# Altium PCB File_Mach_In.PcbDoc
Units mil, origin at the board's own origin, x right, y up, seen from the top; angles counter-clockwise.
Board outline 4260 x 4090 mil, 2 copper layers (Top Layer, Bottom Layer); 41 components, 27 nets, 131 pads, 20 vias.
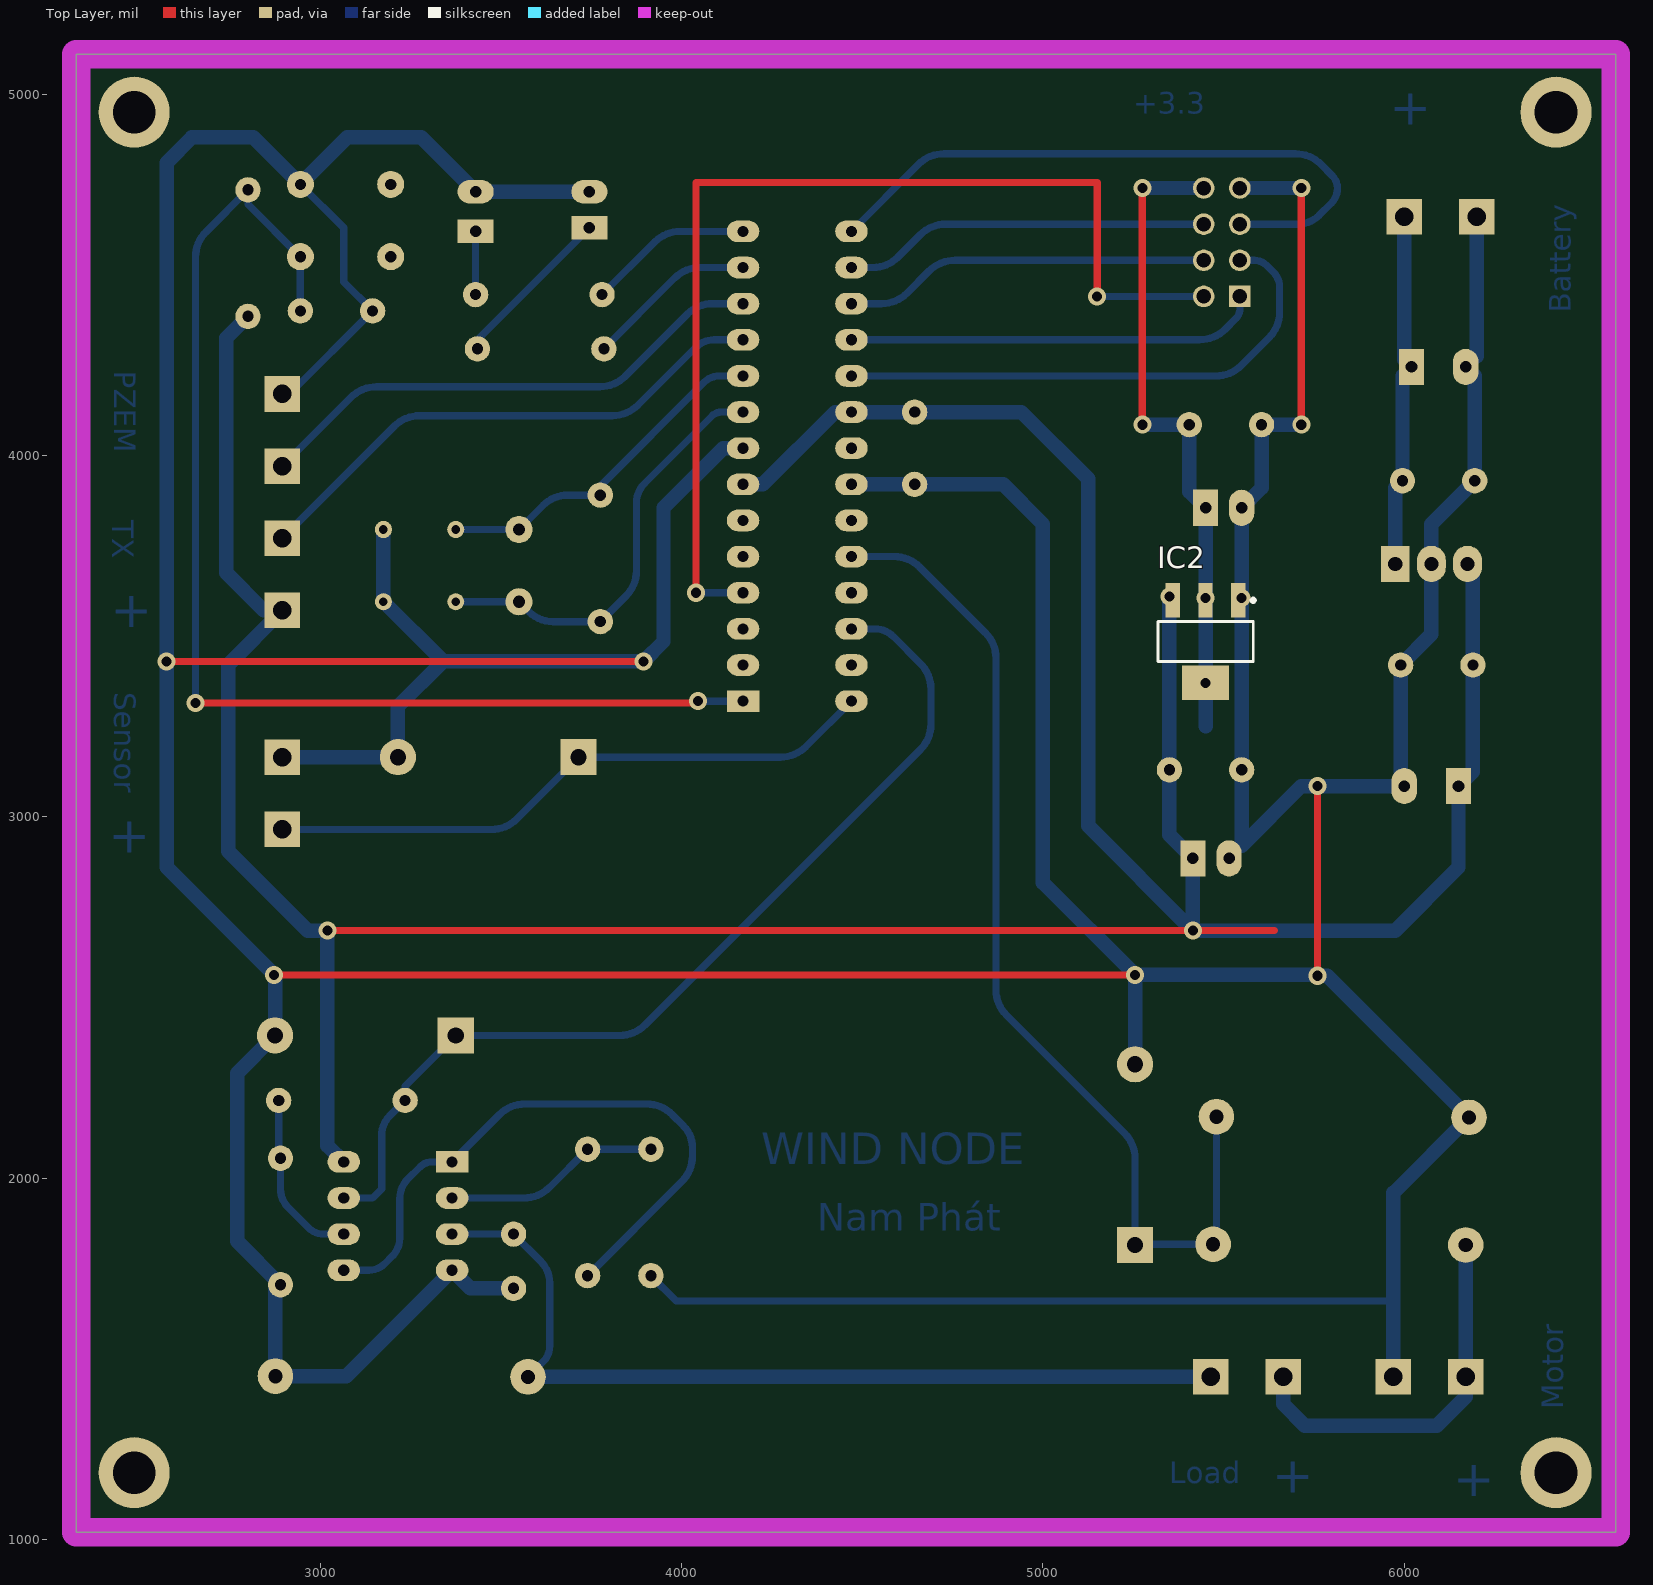
[diagram p0: Top Layer view]
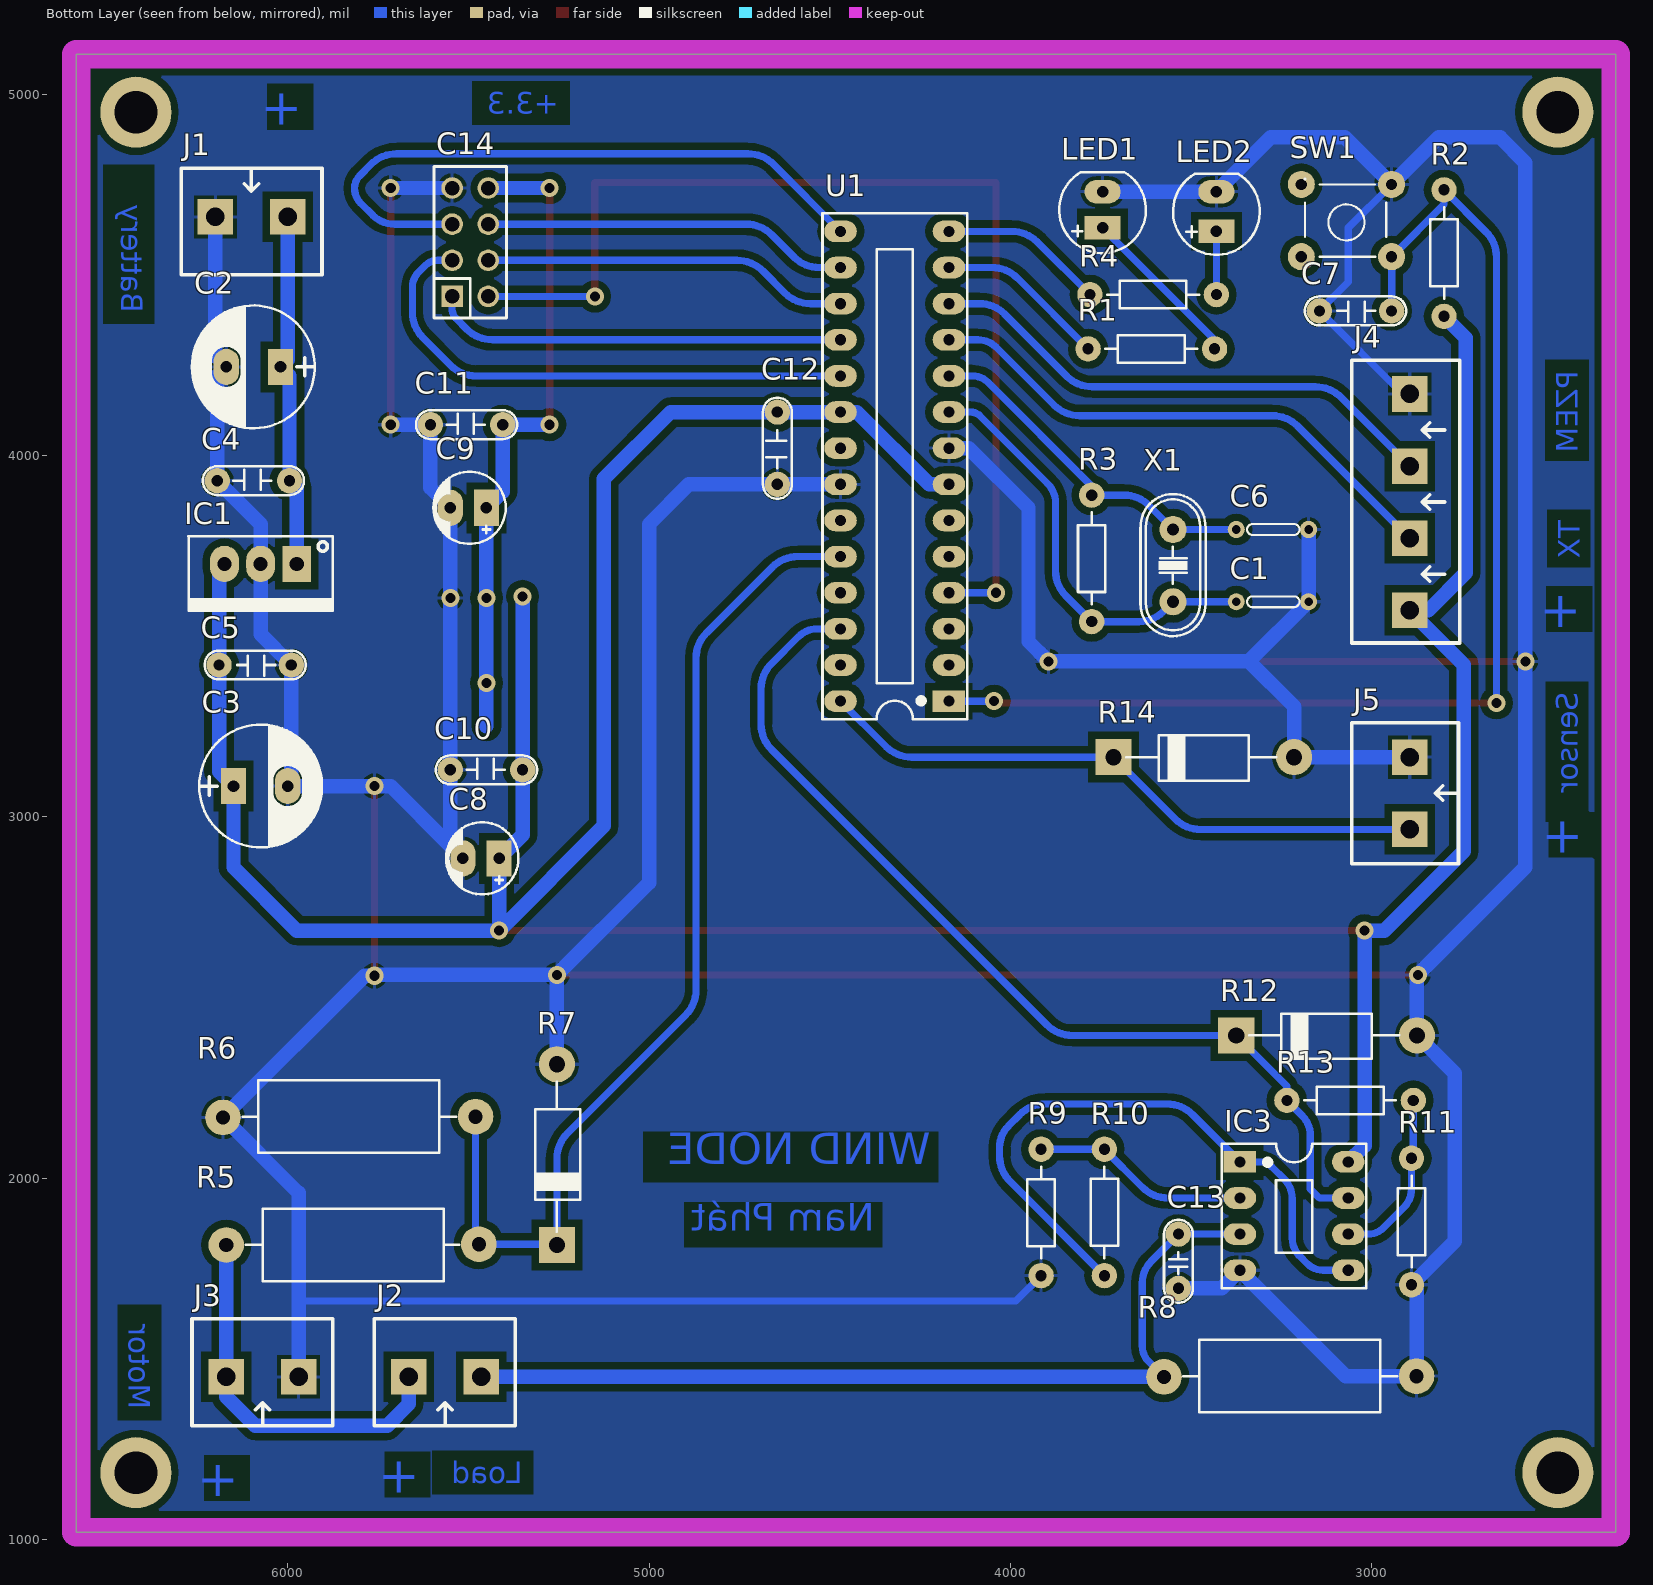
[diagram p1: Bottom Layer view, seen from below]
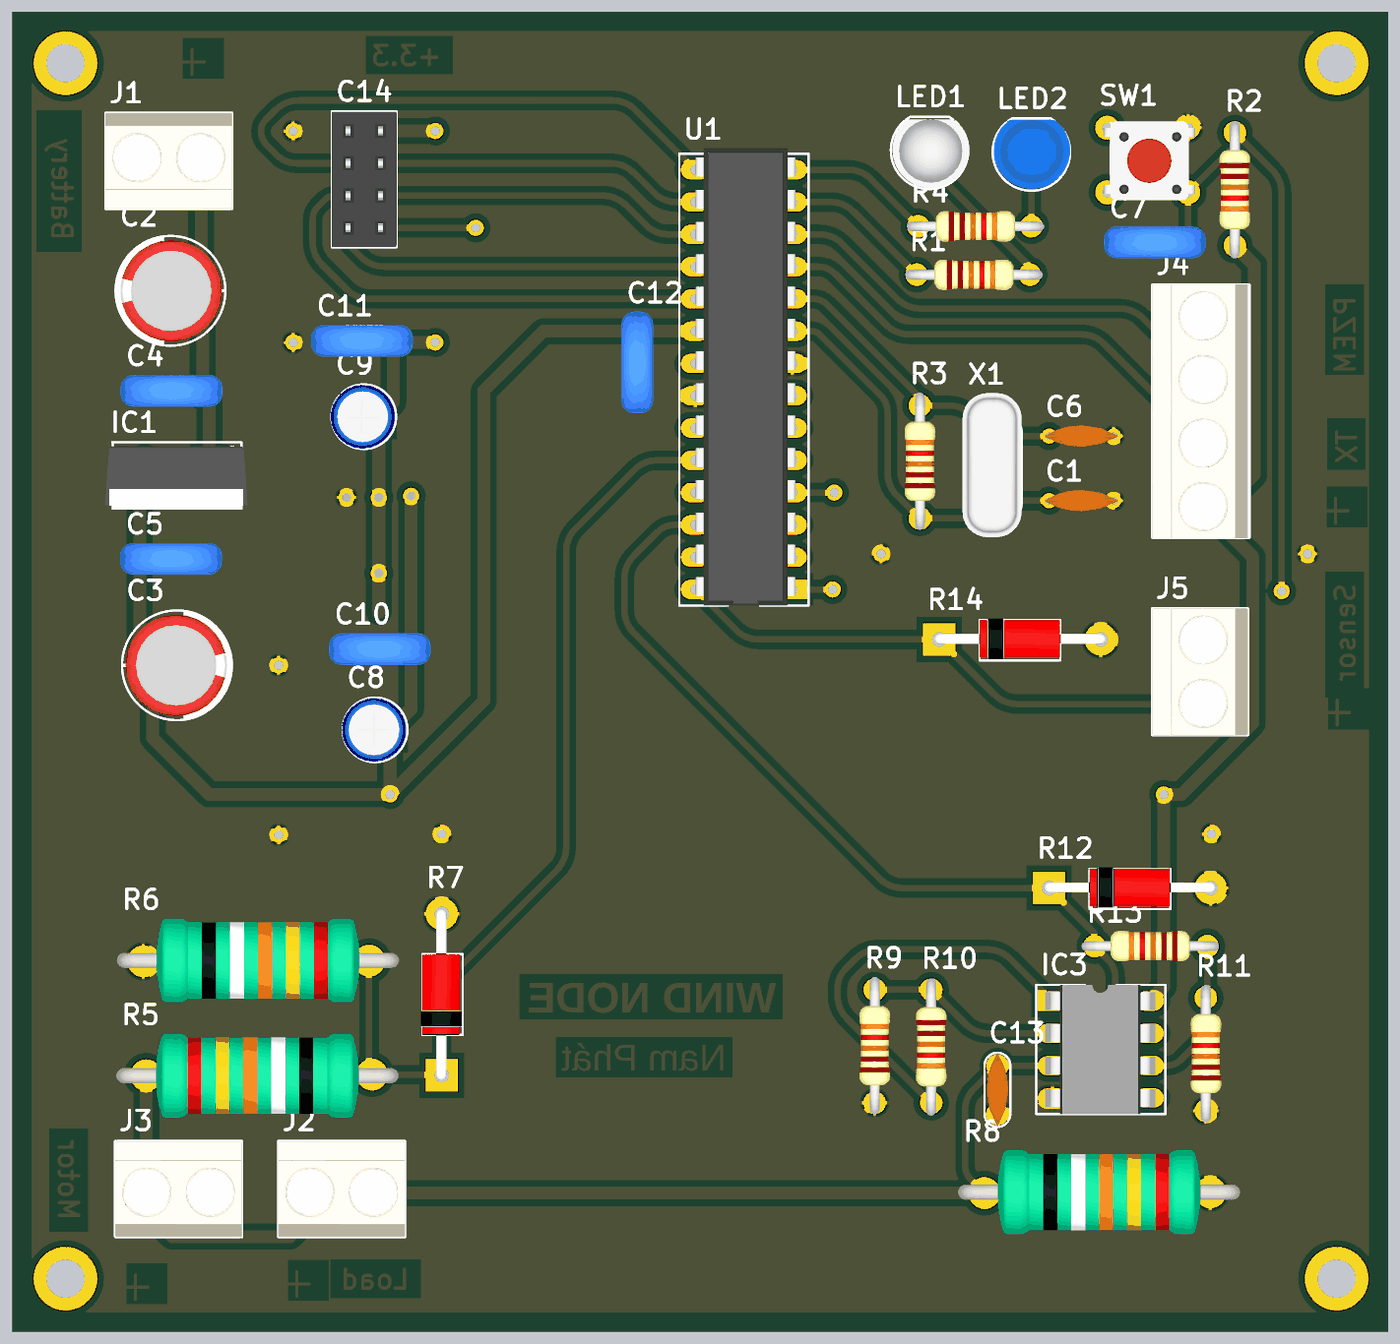
[diagram p2: 3D render of the assembled board from below, using the file's embedded part models]

## Layer stack, top to bottom
Top Solder: solder mask 0.4, Solder Resist, Dk 3.5
Top Layer: signal copper 1.4
Dielectric 1: dielectric 12.6, FR-4, Dk 4.8
Bottom Layer: signal copper 1.4
Bottom Solder: solder mask 0.4, Solder Resist, Dk 3.5

## Board outline
2325,1020 2325,5110 6585,5110 6585,1020

## Design rules (kind name [scope] priority, off if disabled: settings)
Clearance [All] p1: gap=20 ignorepadtopadclearanceinfootprint=FALSE
PolygonConnect [All] p1: connectstyle=Relief reliefconductorwidth=10 reliefentries=4 polygonreliefangle="90 Angle" airgapwidth=10
RoutingVias [All] p1: holewidth=30 width=70 viastyle="Through Hole" minholewidth=30 minwidth=70 maxholewidth=30 maxwidth=70
SolderMaskExpansion [All] p1: expansion=4
Width [All] p1: maxlimit=40 minlimit=20 preferedwidth=20
30 further rules are at their usual default settings.

## Components (designator, comment, footprint, x,y, rotation, side; value= is the part's Value field where it differs from the comment)
C1 "Capacitor Ceramic" Tu-ceramic 3175,3595 r0 bottom value=22p
C2 "220uF/16V" CP1.5/3.4 6020,4245 r0 bottom value=1000uF/16V
C3 "220uF/16V" CP1.5/3.4 6150,3085 r180 bottom value=1000uF/16V
C4 "104" CN2 6195,3930 r180 bottom value=0.1uF
C5 "104" CN2 5990,3420 r0 bottom value=0.1uF
C6 "Capacitor Ceramic" Tu-ceramic 3175,3795 r0 bottom value=22p
C7 "104" CN2 2945,4400 r0 bottom value=0.1uF
C8 "10uF" CP1/2 5415,2885 r0 bottom value=10uF/50V
C9 "10uF" CP1/2 5450,3855 r0 bottom value=10uF/50V
C10 "104" CN2 5550,3130 r180 bottom value=0.1uF
C11 "104" CN2 5605,4085 r180 bottom value=0.1uF
C12 "104" CN2 4645,3920 r90 bottom value=0.1uF
C13 "103" CN1.5 3535,1695 r90 bottom value=0.01uF
C14 "JP4x2" JP4-C2T 5495,4590 r90 bottom
IC1 "LM7805" QTO-220 5975,3700 r0 bottom
IC2 "LM1117" SOT223-4N 5450,3485 r270 top value=LM317
IC3 "LM358" DIP8/W0.3 3365,2045 r270 bottom
J1 "KF2" KF2-5.08 6100,4660 r180 bottom
J2 "KF2" KF2-5.08 5565,1450 r0 bottom
J3 "KF2" KF2-5.08 6070,1450 r0 bottom
J4 "KF4" KF4-5.08 2895,3571 r90 bottom
J5 "KF2" KF2-5.08 2895,3065 r270 bottom
LED1 "LED" LED-5-Yellow 3745,4630 r90 bottom value="LED 3 ly Single Colour"
LED2 "LED" LED-5-BLUE 3430,4675 r90 bottom value="LED 3 ly Single Colour"
R1 "330" R1/4W 3435,4295 r0 bottom value="R1/4W - 1K"
R2 "10k" R1/4W 2800,4385 r90 bottom value="R1/4W - 1K"
R3 "1M" R1/4W 3775,3890 r270 bottom value="R1/4W - 1K"
R4 "330" R1/4W 3430,4445 r0 bottom value="R1/4W - 1K"
R5 "10K/2W" R2W 6170,1815 r180 bottom value="R2W - 47"
R6 "2K/2W" R2W 5480,2170 r0 bottom value="R2W - 47"
R7 "DIODE Zener" "DIO-2A - LONG" 5255,1790 r90 bottom
R8 "0.1/2W" R2W 2876,1452 r0 bottom value="R2W - 47"
R9 "1k" R1/4W 3915,2080 r270 bottom value="R1/4W - 1K"
R10 "10k" R1/4W 3740,1730 r90 bottom value="R1/4W - 1K"
R11 "1k" R1/4W 2890,2055 r270 bottom value="R1/4W - 1K"
R12 "DIODE Zener" "DIO-2A - LONG" 3400,2395 r180 bottom
R13 "10k" R1/4W 3235,2215 r180 bottom value="R1/4W - 1K"
R14 "DIODE Zener" "DIO-2A - LONG" 3740,3165 r180 bottom
SW1 "SW" SW4 2945,4550 r0 bottom value="Button chip 4 pin"
U1 "ATmega328-PU" DIP28 4170,3320 r90 bottom
X1 "16Mhz" XT2 3550,3695 r270 bottom value=4Mhz

## Footprints (in the part's own frame and the unit in brackets; to place one, negate y for a bottom-side part, rotate by r counter-clockwise, add the part's x,y. Pads: shape width x height; smd on the part's side, far side on the other; paste and mask are expansions set on the pad)
CN1.5 [mil]
  round 70 hole 31: 1(0,0) 2(150,0)
  silkscreen extent -40,-40 190,40, body extent -40,-33 190,33, height 235
CN2 [mil]
  round 70 hole 31: 1(0,0) 2(200,0)
  silkscreen extent -40,-40 240,40, body extent -54,-44 260,55, height 407
CP1.5/3.4 [mil] "Tu hoa 220->470uF,16V, 470uF/16V,25V"
  rect 70x100 hole 32: 1(0,0)
  oval 70x100 hole 32: 2(150,0)
  silkscreen extent -95,-170 245,170, body extent -85,-157 230,157, height 446
CP1/2 [mil] "Tu hoa < 22uF/16>50V"
  rect 70x100 hole 32: 1(0,0)
  oval 70x100 hole 32: 2(100,0)
  silkscreen extent -53,-100 147,100, body extent -49,-99 149,99, height 287
"DIO-2A - LONG" [mil] "Diode 2A, W 150mil, L 450mil"
  round 100 hole 45: 1(525,0)
  rect 100x100 hole 45: 2(25,0)
  silkscreen extent 61,-65 476,60, body extent 9,-61 541,65, height 113
DIP8/W0.3 [mil] "8 PIN, W 300mil, Pin to pin 100mil"
  rect 60x90 hole 31: 1(0,0)
  oval 60x90 hole 31: 2(100,0) 3(200,0) 4(300,0) 5(300,300) 6(200,300) 7(100,300) 8(0,300)
  silkscreen extent -50,-50 350,350, body extent -50,-40 350,336, height 201
DIP28 [mil] "DIP, 18-Leads, Row Spacing 7.62mm, Pitch 2.54mm, Body 22.8x7.3mm, Window"
  rect 60x90 hole 31: 1(0,0)
  oval 60x90 hole 31: 2(100,0) 3(200,0) 4(300,0) 5(400,0) 6(500,0) 7(600,0) 8(700,0) 9(800,0) 10(900,0) 11(1000,0) 12(1100,0) 13(1200,0) 14(1300,0) 15(1300,300) 16(1200,300) 17(1100,300) 18(1000,300) 19(900,300) 20(800,300) 21(700,300) 22(600,300) 23(500,300) 24(400,300) 25(300,300) 26(200,300) 27(100,300) 28(0,300)
  silkscreen extent -50,-50 1350,350, body extent -50,-10 1367,300, height 200
JP4-C2T [mm] "8 pins, dual row, straight, gold plating"
  rect 1.52x1.52 hole 1.02: 1(-3.81,1.27)
  round 1.52 hole 1.02: 2(-1.27,1.27) 3(1.27,1.27) 4(3.81,1.27) 5(3.81,-1.27) 6(1.27,-1.27) 7(-1.27,-1.27) 8(-3.81,-1.27)
  silkscreen extent -5.33,-2.54 5.33,2.54, body extent -5.33,-2.54 5.33,2.54, height 8.51
KF2-5.08 [mm]
  rect 2.5x2.5 hole 1.3: 1(-2.54,0) 2(2.54,0)
  silkscreen extent -4.95,-4.08 4.95,3.43, body extent -5,-4.07 5,3.43, height 10
KF4-5.08 [mm]
  rect 2.5x2.5 hole 1.3: 1(0,0) 2(5.08,0) 3(10.147,0) 4(15.215,0)
  silkscreen extent -2.29,-3.53 17.58,4.06, body extent -2.36,-3.43 17.64,4.07, height 10
LED-5-BLUE [mil] "LED 2 PIN, 5 ly , Only colour, pin to pin 110mil"
  rect 65x100 hole 32: 1(-55,0)
  oval 65x100 hole 32: 2(55,0)
  silkscreen extent -120,-120 104,120, body extent -113,-120 100,116, height 339
LED-5-Yellow [mil] "LED 2 PIN, 5 ly , Only colour,pin to pin 100mil"
  rect 65x100 hole 32: 1(0,0)
  oval 65x100 hole 32: 2(100,0)
  silkscreen extent -70,-120 154,120, body extent -67,-122 147,115, height 339
QTO-220 [mil] "TO-220 - 1-2-3"
  rect 80x100 hole 39: 1(0,0)
  oval 80x100 hole 39: 2(100,0) 3(200,0)
  silkscreen extent -100,-76 300,130, body extent -119,-64 322,121, height 755
R1/4W [mil] "R 1/4W, 2 Pin, 350mil"
  round 70 hole 31: 1(0,0) 2(350,0)
  silkscreen extent 48,-38 302,38, body extent -40,-47 386,47, height 111
R2W [mm] "R2W, 2 pin, 700mil"
  round 2.5 hole 1: 1(0,0) 2(17.755,0.051)
  silkscreen extent 1.37,-2.57 16.38,2.54, body extent -2.36,-3.33 19.84,3.27, height 8.3
SOT223-4N [mm] "SOT223, 4-Leads, Body 6.5x3.5mm, Pitch 2.3mm, Lead Span 7mm, IPC Medium Density"
  rect 2.4x1 smd: 1(-2.9,2.3) 2(-2.9,0) 3(-2.9,-2.3)
  rect 2.4x3.3 smd: 4(2.9,0)
  silkscreen extent -3.02,-3.35 1.4,3.48, body extent -3.39,-3.27 3.5,3.23, height 1.72
SW4 [mil] "SW button 4pin, 250 x250 mil"
  round 75 hole 31: 1(0,0) 2(250,-200) 3(250,0) 4(0,-200)
  silkscreen extent 15,-215 240,0, body extent -36,-220 276,24, height 276
Tu-ceramic [mm] "Tu gom mini"
  round 1.2 hole 0.6: 1(0,0) 2(5.08,0)
  silkscreen extent 0.64,-0.38 4.32,0.38, body extent -0.38,-0.85 5.46,0.85, height 6.12
XT2 [mil] "Footpin for Crystal 2 pin"
  round 75 hole 34: 1(-100,0) 2(100,0)
  silkscreen extent -198,-90 195,90, body extent -233,-93 213,90, height 138

## Part data
C1 C6: library part CapDecop, "Capacitor", LatestRevisionDate=17-Jul-2002, LatestRevisionNote="Re-released for DXP Platform.", PackageReference=RAD-0.3, Published=8-Jun-2000, Publisher="Altium Limited"
C2 C3: library part CP4, "Cap 1000uF/16V - 220uF/50V", Description 1="2200uF-3300uF/6,3V - 1000uF-2200uF/10V", Description 2="1000uF/16V - 470uF => 1000uF/25V - 100uF/100V", Description 3=330uF>470uF/35V_220uF>470uF/50V_10uF>22uF/250V, Description 4="220uF => 330uF/63V - 10uF =>33uF/160 - 200V", Description 5="4,7uF>10uF/250V_3,3uF>10uF/400V - 2,2uF>4,7uF/450V"
C4 C5 C7 C10 C11 C12: library part CN2, "Cap np 104 => 105pF"
C8 C9: library part CP1, "Cap P  0,1uF < 22uF , 16 - 50V", Description 1="10 => 220uF/6,3V/10V - 10uF => 100uF/16V", Description 2="0,1uF => 33uF/50V - 10uF => 22uF/63V", Description 3="0,47uF => 10uF/100V"
C13: library part CN1.5, "Cap np 682pF => 104pF"
C14: "WR-PHD 2.54 mm Dual Socket Header", Manufacturer="W¨¹rth Elektronik eiSos GmbH", partNo=61300821821, ComponentLink1 Description=Manufacturer, ComponentLink1URL=http://www.we-online.com, ComponentLink2 Description=Datasheet, ComponentLink2URL=http://katalog.we-online.de/em/datasheet/6130xx21821.pdf, Created by="Karrer Zheng", Created Date="29 March 2013", NoPins=08
IC1: library part LM78xx, "On ap +, from + 5 to + 24VDC", =LM7808
IC2: "Available in 1.8V, 2.5V, 2.85V, 3.3V, 5V, and  Adjustable Versions"
IC3: "Low-Power Dual Operational Amplifier"
J1 J2 J3 J5: Manufacturer="Würth Elektronik eiSos GmbH", partNo=691103110002, ComponentLink1 Description=Manufacturer, ComponentLink1URL=http://www.we-online.com, ComponentLink2 Description=Datasheet, ComponentLink2URL=http://katalog.we-online.de/em/datasheet/6911031100xx.pdf, Created by="Karrer Zheng", Created Date="29 October 2013", NoPins=2
J4: Manufacturer="W¨¹rth Elektronik eiSos GmbH", partNo=691133710004, ComponentLink1 Description=Manufacturer, ComponentLink1 URL=http://www.we-online.com, ComponentLink2 Description=Datasheet, ComponentLink2 URL=http://katalog.we-online.de/em/datasheet/6911337100xx.pdf, Created by="Baojun Chen", Created Date=4-Aug-15, NoPins=4
LED1 LED2: "LED Single colour Green and Red"
R1 R2 R3 R4 R9 R10 R11 R13: library part R1/4W, "Resistor 1/4W"
R5 R6 R8: library part R2W, "Resistor 2W"
R7 R12 R14: "Zenner"
SW1: library part SW4, "Switch button 4 pin"
U1: "8-bit AVR Microcontroller, 32KB Flash, 1KB EEPROM, 2KB SRAM, 28-pin PDIP, Industrial Grade (-40°C to 85°C)", Supplier Part Number 1=ATMEGA328-PU-ND, ComponentLink1Description="Manufacturer Link", ComponentLink1URL=http://www.atmel.com/products/avr/default.asp?, ComponentLink2Description="ATmega48A/48PA/88A/88PA/168A/168PA/328/328P Datasheet", ComponentLink2URL=http://www.atmel.com/dyn/resources/prod_documents/8271.pdf, ComponentLink3Description="ATmega48A/48PA/88A/88PA/168A/168PA/328/328P Summary", ComponentLink3URL=http://www.atmel.com/dyn/resources/prod_documents/8271S.pdf, ComponentLink4Description="Atmel.com Home", ComponentLink4URL=http://www.atmel.com, DatasheetVersion="revA, Jan-2010", PackageDescription="28-lead (0.300\"/7.62mm Wide) Plastic Dual Inline Package (PDIP)", PackageReference=28P3, PackageVersion="revB, Sep-2001", Published=1-Apr-2010, Publisher="Altium Limited", Supplier 1=Digi-Key, Supplier 2=Mouser, Supplier Part Number 2=556-ATMEGA328-PU
X1: library part XT2, "Crystal For all Crystal 2pin."

## Free pads (board coordinates)
  round 196.85 hole 118.11: 2(2485,1185) 2(2485,4950) 2(6420,1185) 2(6420,4950)

## Via types
v1: diameter 50, hole 28, Top Layer to Bottom Layer, 20 vias

## Nets (pads, with @x,y where several pads share a name; then routed paths per layer and width w, separated by ;. In a path a pad name is that pad's centre, name@x,y a point inside that pad or via, vN(x,y) a via of type N, cw(c..) or ccw(c..) an arc to the next point about the centre after c; other vN are vias at no path point)
+5: C3.1 C5.2 C8.1 C10.2 C12.2 IC1.3 IC2.3 IC3.8 J4.1 R2.1 U1.7 U1.20 | length 10412.6
  Top Layer w20: v1(3020,2685) v1(5415,2685) 5640,2685
  Bottom Layer w40: R2.1 2740,4325 2740,3675 2844,3571 J4.1 2745,3421 2745,2905 2965,2685 v1(3020,2685) 3020,2090 IC3.8 ; U1.7 4225,3920 4425,4120 U1.20 C12.2 4940,4120 5125,3935 5125,2975 v1(5415,2685) ; v1(5350,3610) C10.2 5350,2950 C8.1 v1(5415,2685) ; IC1.3 6190,3685 C5.2 6190,3125 C3.1 6150,2860 5975,2685 v1(5415,2685)
+12: C2.1 C4.2 IC1.1 J1.2 | length 986.9
  Bottom Layer w40: IC1.1 5975,3910 C4.2 5995,4220 C2.1 6000,4265 J1.2
DC_Cur: IC3.7 R12.2 R13.1 U1.26 | length 2712.4
  Bottom Layer w20: IC3.7 3145,1945 3170,1970 3170,2118.18 cw(c3246.82,2118.18) 3192.49,2172.49 R13.1 3235,2255 R12.2 3828.58,2395 ccw(c3828.58,2495) 3899.29,2424.29 4660.71,3185.71 ccw(c4590,3256.42) 4690,3256.42 4690,3353.58 ccw(c4590,3353.58) 4660.71,3424.29 4586.21,3498.79 ccw(c4535,3447.57) 4535,3520 U1.26
DC_Vol: R5.2 R6.1 R7.2 U1.24 | length 2880.2
  Bottom Layer w20: U1.24 4588.58,3720 cw(c4588.58,3620) 4659.29,3690.71 4840.71,3509.29 cw(c4770,3438.58) 4870,3438.58 4870,2521.42 ccw(c4970,2521.42) 4899.29,2450.71 5225.71,2124.29 cw(c5155,2053.58) 5255,2053.58 R7.2 5257,1817 R5.2 5480,1826 R6.1
GND: C1.1 C2.2 C3.2 C4.1 C5.1 C6.1 C7.2 C8.2 C9.2 C10.1 C11.1 C12.1 C13.1 C14.4 IC1.2 IC2.1 IC3.4 J1.1 J3.1 J4.4 J5.1 LED1.2 LED2.2 R6.2 R7.1 R8.1 R9.2 R11.2 R12.1 R14.1 SW1.4 U1.8 U1.22 | length 23647.6
  Top Layer w20: v1(2575,3430) v1(3895,3430) ; v1(2872.5,2562.5) v1(5255,2562.5) ; v1(5715,4085) v1(5715,4740) ; v1(5760,2560) v1(5760,3085)
  Bottom Layer w20: J4.4 2915,4170 C7.2 3065,4480 3065,4630 SW1.4 ; R9.2 3985,1660 5970,1660 ; C8.2 5550,2920
  Bottom Layer w40: J5.1 R14.1 3215,3305 3340,3430 ; C6.1 C1.1 3340,3430 ; C13.1 3415,1695 IC3.4 3072,1452 R8.1 2876,1691 R11.2 2770,1825 2770,2290 R12.1 2875,2560 v1(2872.5,2562.5) 2575,2860 v1(2575,3430) 2575,4810 2645,4880 2815,4880 SW1.4 3075,4880 3280,4880 LED2.2 LED1.2 ; U1.8 4115,4020 3950,3855 3950,3485 v1(3895,3430) 3340,3430 ; U1.22 C12.1 4890,3920 5000,3810 5000,2817.5 v1(5255,2562.5) ; R7.1 v1(5255,2562.5) ; C14.4 v1(5715,4740) ; v1(5715,4085) C11.1 5605,3910 C9.2 v1(5550,3605) C10.1 5550,2920 5715,3085 v1(5760,3085) C3.2 5990,3095 C5.1 6075,3505 IC1.2 6075,3810 C4.1 6195,4220 C2.2 6200,4275 J1.1 ; J3.1 5970,1660 5970,1959 R6.2 5787,2560 v1(5760,2560) 5757.5,2562.5 v1(5255,2562.5)
LED0: R1.2 U1.13 | length 473.9
  Bottom Layer w20: R1.2 3980.71,4490.71 cw(c4051.42,4420) 4051.42,4520 U1.13
LED1: R4.2 U1.14 | length 458.2
  Bottom Layer w20: R4.2 3925.71,4590.71 cw(c3996.42,4520) 3996.42,4620 U1.14
NetC13_2: C13.2 IC3.3 J2.1 R8.2 | length 2515
  Bottom Layer w20: IC3.3 C13.2 3610,1770 cw(c3549.64,1709.64) 3610.04,1769.96 cw(c3549.64,1709.64) 3635,1709.64 3635,1534.75 cw(c3575.25,1534.75) 3617.53,1492.53 ; R8.2 3617.5,1492.5
  Bottom Layer w40: R8.2 J2.1
NetIC3_1: IC3.1 IC3.5 R10.1 | length 1773
  Bottom Layer w20: IC3.5 3135,1745 ccw(c3135,1805.36) 3177.68,1762.68 3200,1785 ccw(c3151.72,1833.28) 3220,1833.28 3220,1943.18 cw(c3296.82,1943.18) 3242.49,1997.49 3275.86,2030.86 ; 3275.88,2030.88 cw(c3310,1996.72) 3310,2045 IC3.1 3495.71,2175.71 cw(c3566.42,2105) 3566.42,2205 3903.58,2205 cw(c3903.58,2105) 3974.29,2175.71 4005.25,2144.75 ; R10.1 4000.71,1990.71 ccw(c3930,2061.42) 4030,2061.42 4030,2085 ccw(c3945.5,2085) 4005.28,2144.72
NetIC3_2: IC3.2 R9.1 R10.2 | length 601.6
  Bottom Layer w20: IC3.2 3563.58,1945 ccw(c3563.58,2045) 3634.29,1974.29 R10.2 R9.1
NetIC3_6: IC3.6 R11.1 R13.2 | length 485.7
  Bottom Layer w20: R13.2 2885,2060 R11.1 2890,1970 ccw(c2962.43,1970) 2911.21,1918.79 2967.32,1862.68 ccw(c3010,1905.36) 3010,1845 IC3.6
NetLED1_1: LED1.1 R1.1 | length 463.4
  Bottom Layer w20: R1.1 3435,4320 LED1.1
NetLED2_1: LED2.1 R4.1 | length 175
  Bottom Layer w20: R4.1 LED2.1
OSC1: C1.2 R3.2 U1.9 X1.2 | length 1197.3
  Bottom Layer w20: C1.2 X1.2 3577.5,3567.5 ccw(c3643.89,3633.89) 3643.89,3540 R3.2 3846.72,3611.72 ccw(c3778.43,3680) 3875,3680 3875,3868.18 cw(c3951.82,3868.18) 3897.49,3922.49 4084.39,4109.39 cw(c4110,4083.79) 4110,4120 U1.9
OSC2: C6.2 R3.1 U1.10 X1.1 | length 978.9
  Bottom Layer w20: C6.2 X1.1 3616.72,3861.72 cw(c3685,3793.43) 3685,3890 R3.1 3775,3915 4062.32,4202.32 cw(c4105,4159.64) 4105,4220 U1.10
PB1: C14.3 U1.15 | length 1794.2
  Bottom Layer w20: U1.15 4655.71,4805.71 cw(c4726.42,4735) 4726.42,4835 5698.58,4835 cw(c5698.58,4735) 5769.29,4805.71 5800.86,4774.14 ; C14.3 5704.64,4640 ccw(c5704.64,4725.36) 5764.96,4664.96 ccw(c5704.64,4725.36) 5765,4665 5797.32,4697.32 ccw(c5754.64,4740) 5815,4740 ccw(c5766.72,4740) 5800.88,4774.12
PB2: C14.6 U1.16 | length 1016.2
  Bottom Layer w20: U1.16 4530,4520 ccw(c4530,4616.57) 4598.28,4548.28 4660.71,4610.71 cw(c4731.42,4540) 4731.42,4640 C14.6
PB3: C14.7 U1.17 | length 1016.1
  Bottom Layer w20: U1.17 4553.58,4420 ccw(c4553.58,4520) 4624.29,4449.29 4685.71,4510.71 cw(c4756.42,4440) 4756.42,4540 C14.7
PB4: C14.1 U1.18 | length 1148.1
  Bottom Layer w20: U1.18 5433.58,4320 ccw(c5433.58,4420) 5504.29,4349.29 5534.39,4379.39 ccw(c5508.79,4405) 5545,4405 C14.1
PB5: C14.2 U1.19 | length 1493.4
  Bottom Layer w20: U1.19 5478.58,4220 ccw(c5478.58,4320) 5549.29,4249.29 5625.71,4325.71 ccw(c5555,4396.42) 5655,4396.42 5655,4465.25 ccw(c5595.25,4465.25) 5637.53,4507.47 ; C14.2 5585,4540 cw(c5585,4491.72) 5619.12,4525.88 ; 5619.14,4525.86 5637.5,4507.5
PC5: J5.2 R14.2 U1.28 | length 1713.4
  Bottom Layer w20: J5.2 3473.58,2965 ccw(c3473.58,3065) 3544.29,2994.29 R14.2 4273.58,3165 ccw(c4273.58,3265) 4344.29,3194.29 U1.28
PD2: C14.8 U1.4 | length 2985
  Top Layer w20: v1(4040,3620) 4040,4755 5150,4755 v1(5150,4440)
  Bottom Layer w20: v1(4040,3620) U1.4 ; v1(5150,4440) C14.8
PD5: J4.2 U1.11 | length 1490.7
  Bottom Layer w20: J4.2 3204.71,4080.71 cw(c3275.42,4010) 3275.42,4110 3808.58,4110 ccw(c3808.58,4210) 3879.29,4139.29 4038.79,4298.79 cw(c4090,4247.57) 4090,4320 U1.11
PD6: J4.3 U1.12 | length 1448.4
  Bottom Layer w20: J4.3 3085.21,4160.71 cw(c3155.92,4090) 3155.92,4190 3773.58,4190 ccw(c3773.58,4290) 3844.29,4219.29 4016.72,4391.72 cw(c4085,4323.43) 4085,4420 U1.12
RESET: C7.1 R2.2 SW1.1 U1.1 | length 3387.9
  Top Layer w20: v1(2655,3315) 4040,3315 v1(4045,3320)
  Bottom Layer w20: v1(2655,3315) 2655,4548.58 cw(c2755,4548.58) 2684.29,4619.29 R2.2 2800,4695 SW1.1 C7.1 ; v1(4045,3320) U1.1
VCC3.3: C9.1 C11.2 C14.5 IC2.2 | length 1808.6
  Top Layer w20: v1(5275,4085) v1(5275,4740)
  Bottom Layer w40: v1(5275,4085) C11.2 5405,3900 C9.1 v1(5450,3605) v1(5450,3370) 5450,3250 ; v1(5275,4740) C14.5
VCC30V: J2.2 J3.2 R5.1 | length 1058
  Bottom Layer w40: J2.2 5665,1375 5725,1315 6090,1315 6170,1395 J3.2 R5.1
pads on no net: IC2.4 SW1.2 SW1.3 U1.2 U1.3 U1.5 U1.6 U1.21 U1.23 U1.25 U1.27

## Polygon pours and split planes (outlines as drawn)
GND on Bottom Layer "GND_L02_P000" (solid, pour order 0): 2325,5110 6585,5110 6585,1020 2325,1020 2325,5110

## Keep-outs
Keep-Out Layer:
  the board outline again, w78.74

## Other copper
Bottom Layer:
  text "+3.3" at 5250,4945 h60
  text "+" at 5960,4915 h100
  text "Battery" at 6460,4395 h60 r90
  text "PZEM" at 2430,4235 h60 r270
  text "TX" at 2425,3820 h60 r270
  text "+" at 2420,3525 h100
  text "Sensor" at 2430,3345 h60 r270
  text "+" at 2415,2900 h100
  text "WIND NODE" at 4220,2010 h150
  text "Nam Phát" at 4375,1830 h130
  text "Motor" at 6440,1360 h60 r90
  text "Load" at 5350,1155 h60
  text "+" at 5635,1130 h100
  text "+" at 6135,1120 h100

## Dimensions
6715,5150 to 6810,980 on Multi-Layer
2285,5330 to 6625,5300 on Multi-Layer